# EAGLE board EthertronicsStampedMetal_Antenna (EAGLE 7.7.0)
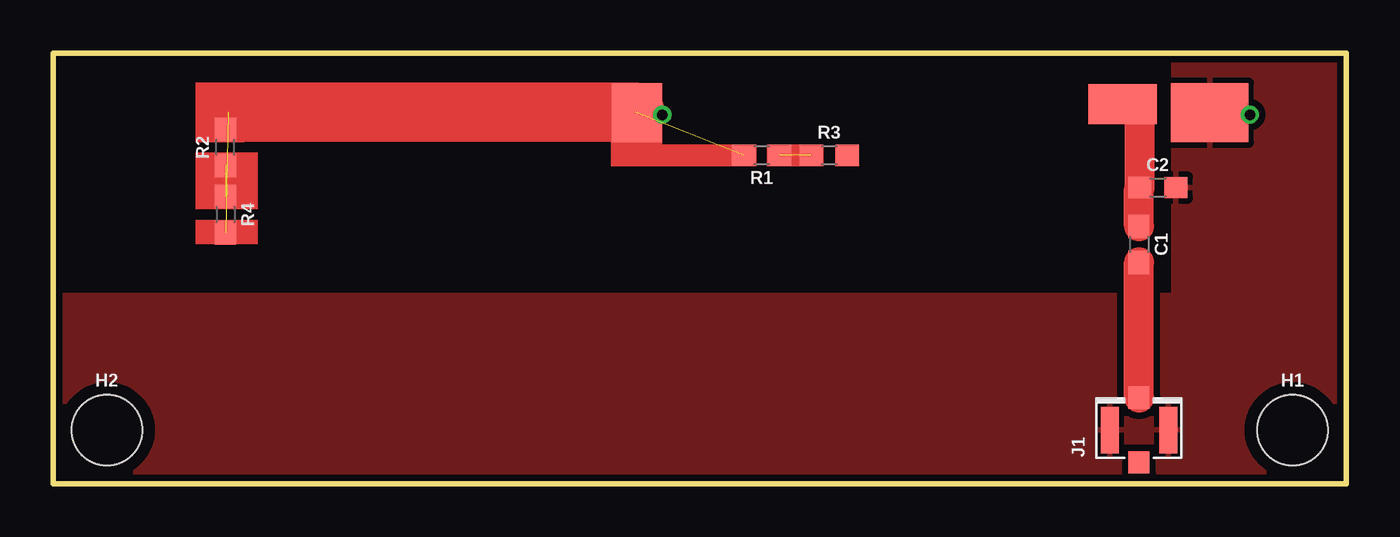
[diagram p0: board, top side]
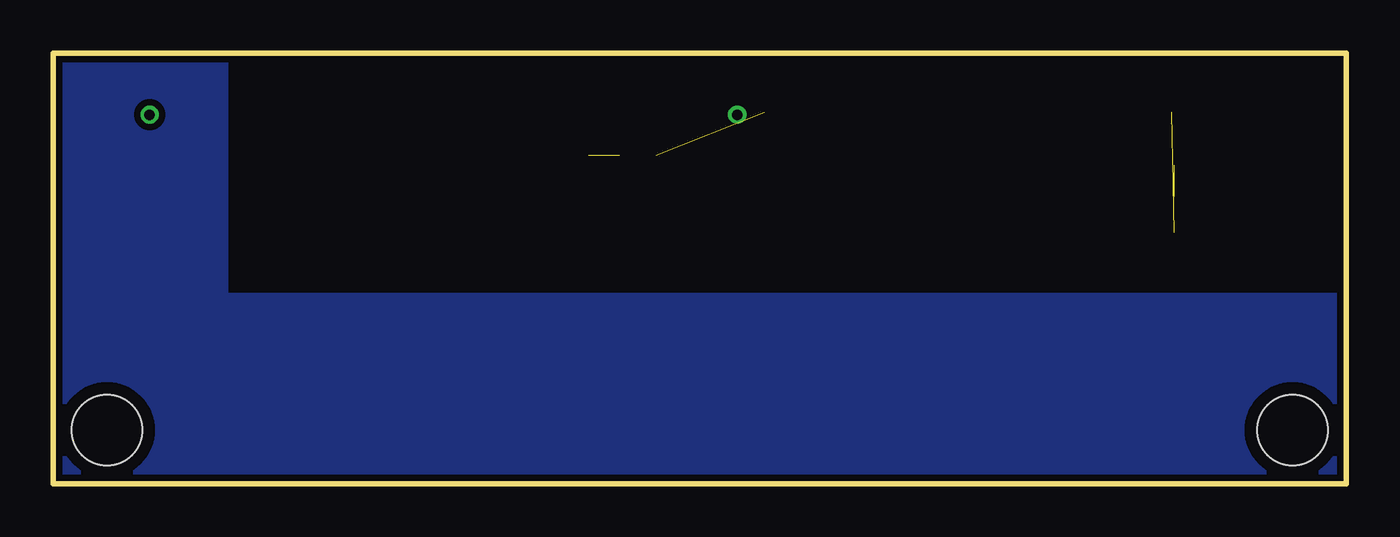
[diagram p1: board, bottom side, seen from below]

Size 60.96 x 20.32 mm. Coordinates in mm from the lower left corner, seen from the top.
Outline: 0,0 0,20.32 60.96,20.32 60.96,0 0,0
Copper layers (1*16): Top 0.035mm / dielectric 1.5mm / Bottom 0.035mm
Design rules "SparkFun-2-layer-PCBWay-LIMIT": minimum track width 6mil, minimum drill 0.3mm, track to track 6mil, track to pad 6mil, pad to pad 6mil, via to via 6mil, smd to smd 6mil, copper to edge 6mil, drill to drill 6mil, minimum pad ring 7mil, minimum via ring 7mil, stop-mask expansion 4mil, vias tented up to drill 25mil, thermal gap 10mil

## Footprints (pad centres in the part's own frame; a part is rotated, then mirrored left to right if it is on the bottom)
0603 = smd 1.1 x 1: 1 -0.85,0; 2 0.85,0
STAND-OFF = hole 3.302: 0,0
U.FL = smd 2.2 x 0.85: 1 0,1.375; 2 0,-1.375 | smd 1.05 x 1: FEED 1.525,0; NC -1.525,0
ETHERTRONICS_ISM_STAMPED = smd 3.23 x 1.88: FEED 8.5,1.4 | smd 3.66 x 2.79: GND 12.6,1 | drill 0.5: P$4 -13.2,0.9; P$5 14.5,0.9 | smd 2.39 x 2.79: STRIP -14.4,1

## Placement (x,y rotation side)
C1  4.7pF  [0603]  51.18,11.3 270 top
C2  1.0pF  [0603]  52.07,13.97 0 top
H1  STAND-OFF  [STAND-OFF]  58.42,2.54 0 top
H2  STAND-OFF  [STAND-OFF]  2.54,2.54 0 top
J1  U.FL  [U.FL]  51.18,2.54 90 top
R1  0  [0603]  33.4,15.49 180 top
R2  0  [0603]  8.13,15.88 90 top
R3  0  [0603]  36.58,15.49 0 top
R4  0  [0603]  8.13,12.7 270 top
U$1  ETHERTRONICS_STAMPED_ANTENNA  [ETHERTRONICS_ISM_STAMPED]  41.91,16.51 0 top

## Library data of the parts
C1 = SparkFun-Capacitors; PROD_ID: CAP-07880
C2 = SparkFun-Capacitors; PROD_ID: CAP-07879
H1 H2 = SparkFun-Hardware
J1 = SparkFun-Connectors; PROD_ID: CONN-09193; SF_ID: WRL-09144
R1-R4 = SparkFun-Resistors; PROD_ID: RES-08609
U$1 = SparkX

## Nets
FEED: C1.1 C2.1 U$1.FEED
GND: C2.2 J1.1 J1.2 U$1.GND
N$1: C1.2 J1.FEED
N$2: R2.1 R4.1
N$3: R1.1 R3.1
STRIP: R1.2 R4.2

## Tracks (layer width: path | path; a pad name or v marks a point on that pad's centre or on a via)
FEED
  Top 1.422: C1.1 51.18,13.93 C2.1 51.22,17.36 50.8,17.78 50.54,17.78 U$1.FEED
GND
  pour Bottom (isolate 0.305): 60.96,20.32 52.83,20.32 52.83,8.89 0,8.89 0,0 60.96,0
  pour Top (isolate 0.305): 60.96,20.32 52.83,20.32 52.83,8.89 0,8.89 0,0 60.96,0
N$1
  Top 1.422: J1.FEED C1.2
N$2  (1 unrouted)
N$3  (1 unrouted)
STRIP  (2 unrouted)
  Top 2.794: 27.43,17.53 8.25,17.53
(copper drawn outside any net)
  shapes: Top area x6